# EAGLE board Autopilot_remote_sender (EAGLE 9.5.1)
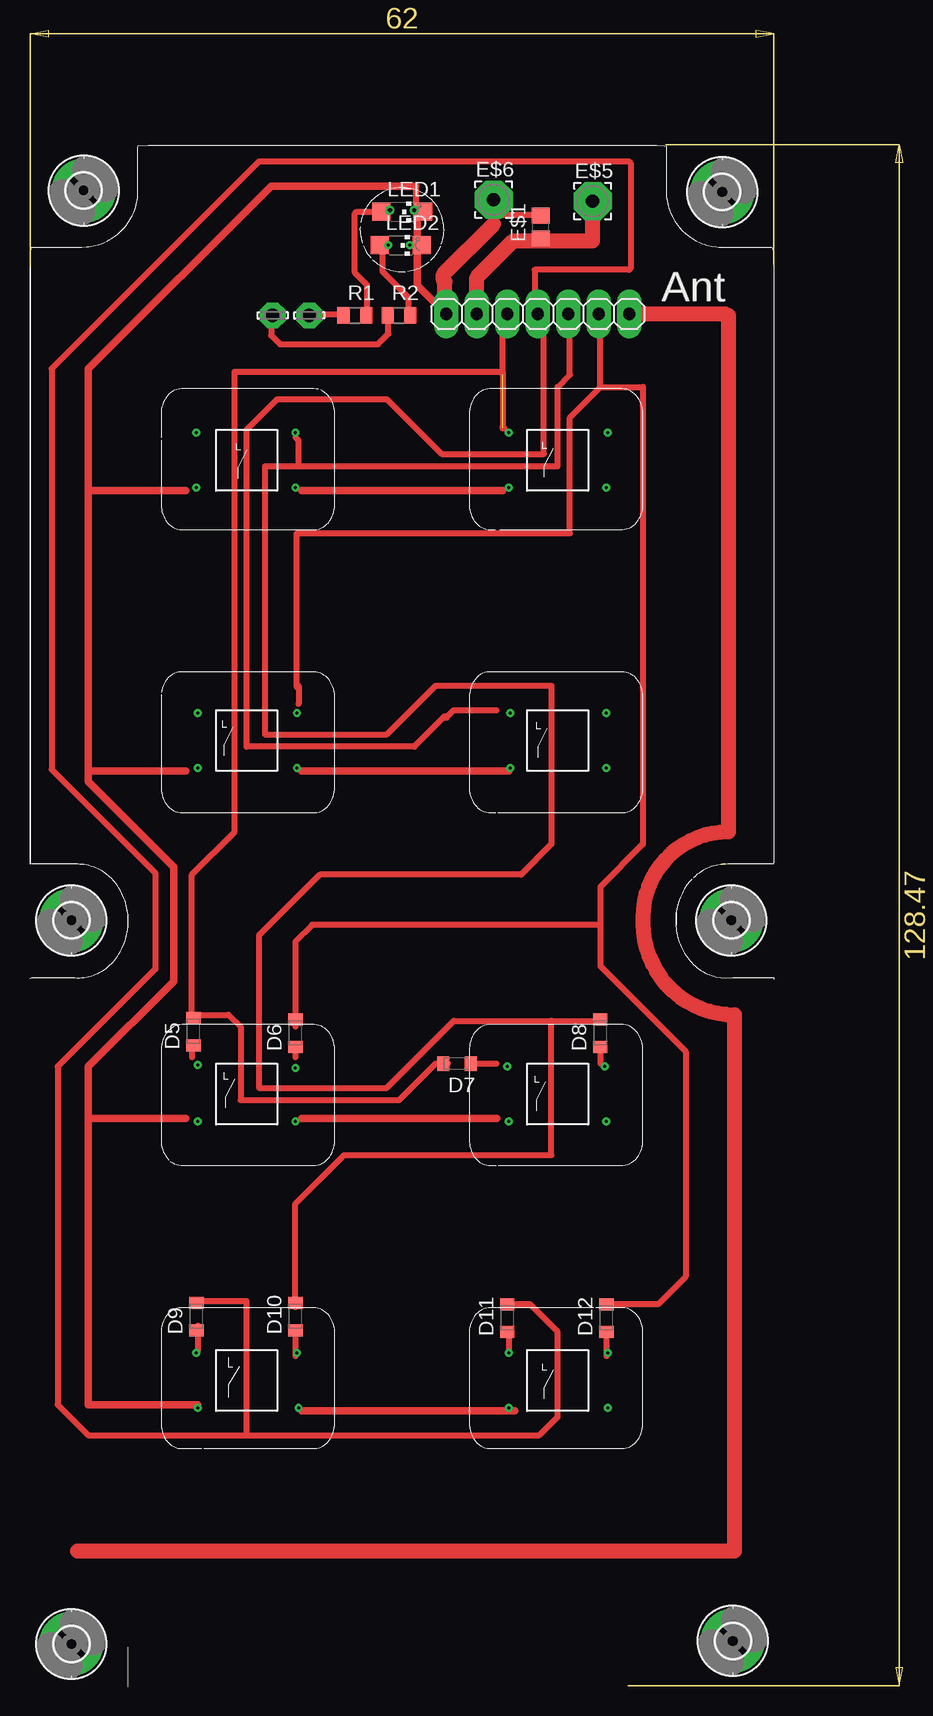
[diagram p0: board, top side]
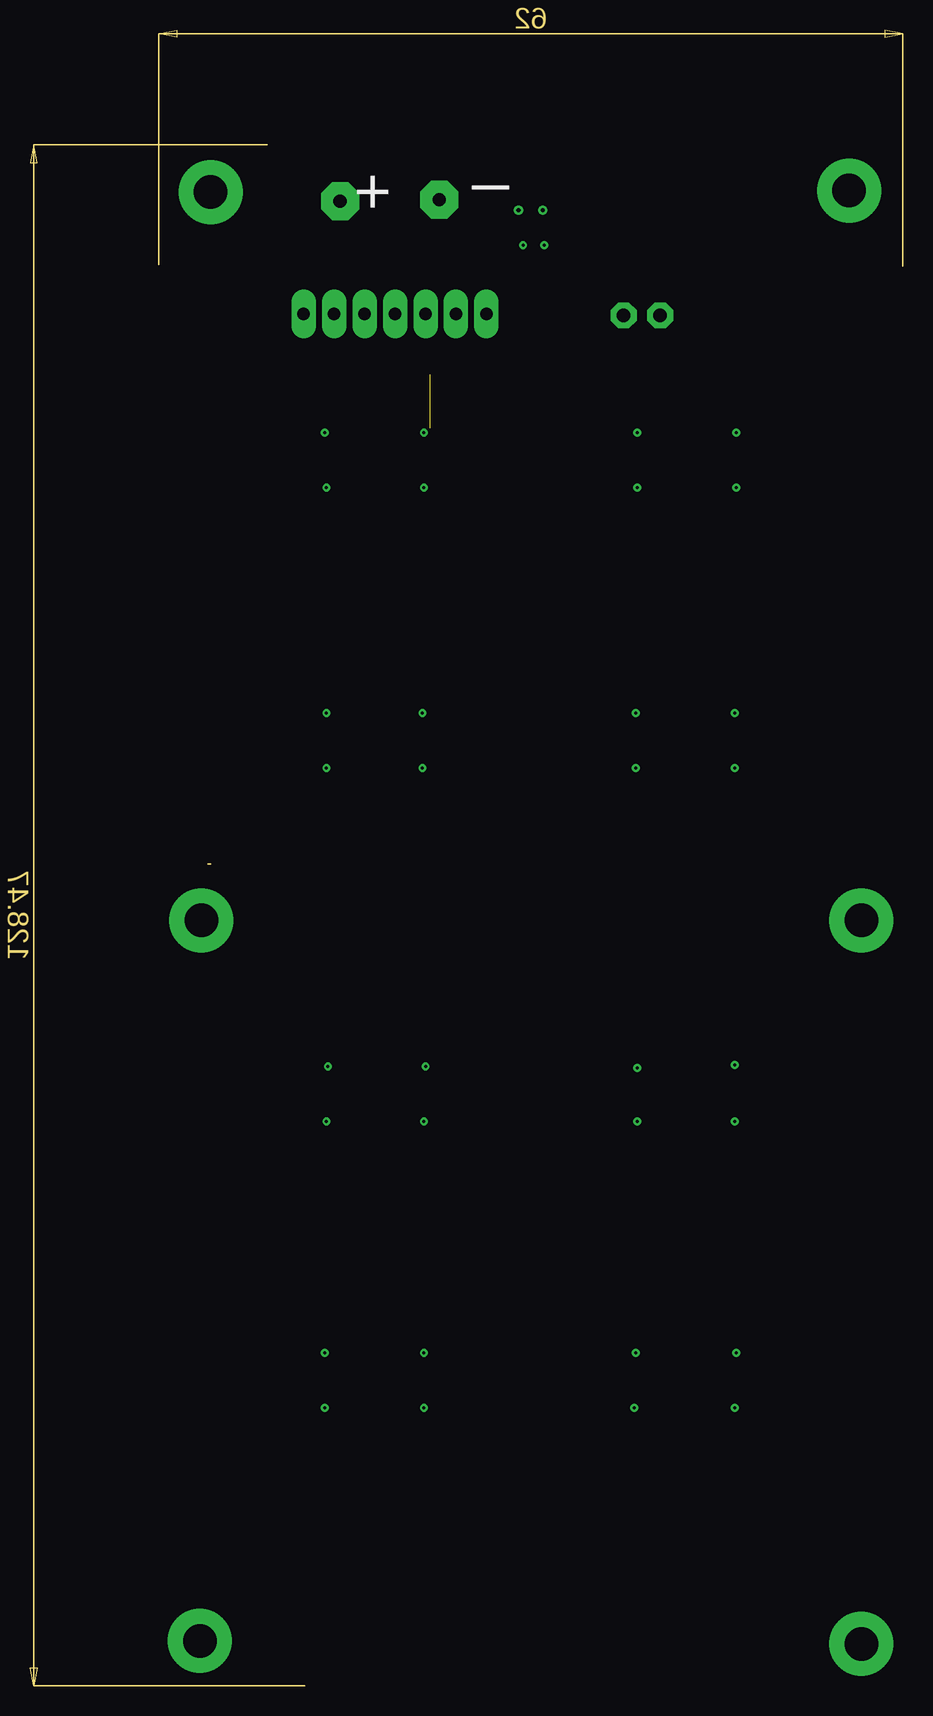
[diagram p1: board, bottom side, seen from below]

Size 0.25 x 0 mm. Coordinates in mm from the lower left corner, seen from the top.
Outline: 0.25,0 0,0
Copper layers (1*16): Top 0.035mm / dielectric 1.5mm / Bottom 0.035mm
Design rules "default *": minimum track width 20mil, minimum drill 0.6mm, track to track 15mil, track to pad 15mil, pad to pad 15mil, via to via 15mil, smd to smd 6mil, copper to edge 40mil, drill to drill 6mil, minimum pad ring 20mil, minimum via ring 8mil, stop-mask expansion 4mil, vias tented up to drill 0mil, thermal gap 10mil

## Footprints (pad centres in the part's own frame; a part is rotated, then mirrored left to right if it is on the bottom)
SOD110-W = smd 1 x 1.2: A 1.15,0; C -1.15,0
C0805 = smd 1.3 x 1.5: 1 -0.95,0; 2 0.95,0
1X07 = drill 1.016 long: 1 -7.62,0; 2 -5.08,0; 3 -2.54,0; 4 0,0; 5 2.54,0; 6 5.08,0; 7 7.62,0
LSP11 = drill 1.118 pad 2.159 octagon: MP 0,0
3,17/1,1 = drill 1.118 pad 3.175 octagon: 1 0,0
2,8-PAD = drill 2.8 pad 5.334: B2,8 0,0
CHIPLED_1206 = smd 1.5 x 1.5: A 0,-1.75; C 0,1.75
R0805 = smd 1.02 x 1.4: 1 -0.94,0; 2 0.94,0

## Placement (x,y rotation side)
D5  1N4148  [SOD110-W]  -44.07,-13.97 90 top  (outside the outline)
D6  1N4148  [SOD110-W]  -35.56,-14.1 90 top  (outside the outline)
D7  1N4148  [SOD110-W]  -22.1,-16.64 180 top  (outside the outline)
D8  1N4148  [SOD110-W]  -10.16,-14.1 90 top  (outside the outline)
D9  1N4148  [SOD110-W]  -43.81,-37.72 90 top  (outside the outline)
D10  1N4148  [SOD110-W]  -35.56,-37.72 90 top  (outside the outline)
D11  1N4148  [SOD110-W]  -17.91,-37.85 90 top  (outside the outline)
D12  1N4148  [SOD110-W]  -9.65,-37.85 90 top  (outside the outline)
E$1  [C0805]  -15.11,53.09 90 top  (outside the outline)
E$2  [1X07]  -15.37,45.85 0 top  (outside the outline)
E$4  [LSP11]  -34.42,45.72 0 top  (outside the outline)
E$5  [3,17/1,1]  -10.79,55.25 0 top  (outside the outline)
E$6  [3,17/1,1]  -19.05,55.37 0 top  (outside the outline)
E$17  [2,8-PAD]  0,56.01 0 top  (outside the outline)
E$18  [2,8-PAD]  -53.21,56.13 0 top  (outside the outline)
E$19  [LSP11]  -37.46,45.72 0 top  (outside the outline)
E$22  [2,8-PAD]  -54.23,-4.7 0 top  (outside the outline)
E$23  [2,8-PAD]  0.76,-4.7 0 top  (outside the outline)
E$24  [2,8-PAD]  0.89,-64.77 0 top  (outside the outline)
E$25  [2,8-PAD]  -54.23,-65.02 0 top  (outside the outline)
LED1  [CHIPLED_1206]  -26.67,54.36 270 top  (outside the outline)
LED2  [CHIPLED_1206]  -26.8,51.56 270 top  (outside the outline)
R1  100R  [R0805]  -30.61,45.72 0 top  (outside the outline)
R2  300R  [R0805]  -26.92,45.72 0 top  (outside the outline)

## Library data of the parts
D5-D12 = diode
E$1 = rcl
E$2 = pinhead
E$4 E$19 = solpad
E$5 E$6 = wirepad
E$17 E$18 E$22-E$25 = holes
LED1 LED2 = led
R1 R2 = smd-ipc

## Nets
S$5: E$2.5
S$8: E$2.1
S$24: E$2.3
S$25: E$2.6
S$26: E$2.4

## Tracks (layer width: path | path; a pad name or v marks a point on that pad's centre or on a via)
S$1
  Top 0.61: -44.7,31.12 -52.83,31.12 -52.83,7.75 | -52.83,7.75 -52.83,6.86 -45.72,-0.25 -45.72,-9.78 -52.83,-16.89 -52.83,-21.21 | -52.83,-21.21 -52.83,-45.08 -43.69,-45.08 | -44.7,-21.21 -52.83,-21.21 | -44.7,7.75 -52.83,7.75
S$2
  Top 0.61: -35.05,7.75 -17.78,7.75
S$3
  Top 0.61: -35.05,31.12 -18.29,31.12
S$4
  Top 0.61: -35.05,-21.21 -18.8,-21.21
S$6
  Top 0.61: -35.05,-45.59 -17.27,-45.59
S$7
  Top 1.27: 0.25,45.85 -6.98,45.85
S$8
  Top 0.61: -25.4,53.47 -25.4,48.26 E$2.1
S$9
  Top 0.508: -28.32,51.05 -28.32,49.4 -26.16,47.24 -26.16,46.23
S$10
  Top 0.508: -25.53,56.51 -25.53,53.47
  Top 0.61: -52.83,30.61 -52.83,41.28 -37.59,56.51 -25.53,56.51
S$11
  Top 1.27: 0.51,45.72 0.51,2.67 arc90 -6.6,-4.44 -6.6,-4.95 arc90 1.02,-12.57 1.02,-57.28 -53.72,-57.28
S$12
  Top 0.508: -35.31,33.27 -35.31,35.31 -35.56,35.56
S$14
  Top 0.508: -35.31,14.86 -35.31,13.33
S$15
  Top 0.508: -18.8,12.83 -22.35,12.83 -22.99,12.19 -23.11,12.19
S$16
  Top 0.508: -35.56,-15.11 -35.56,-16.13
S$17
  Top 0.508: -44.2,-15.11 -44.2,-16.13
S$18
  Top 0.508: -20.83,-16.64 -18.8,-16.64
S$19
  Top 0.508: -10.16,-15.11 -10.16,-16.64
S$20
  Top 0.508: -43.69,-38.48 -43.69,-40.51
S$21
  Top 0.508: -35.56,-38.99 -35.56,-41.02
S$22
  Top 0.508: -17.78,-38.99 -17.78,-40.51
S$23
  Top 0.508: -9.65,-38.99 -9.65,-41.02
S$27
  Top 0.508: -35.56,-36.96 -35.56,-28.32 -31.5,-24.26 -14.22,-24.26 -14.22,-13.08 | -12.7,44.45 -12.7,40.77 -13.72,39.75 -13.72,33.15 -38.1,33.15 -38.1,10.8 -27.94,10.8 -23.88,14.86 -14.22,14.86 -14.22,1.65 -16.76,-0.89 -33.53,-0.89 -38.61,-5.97 -38.61,-18.67 -27.94,-18.67 -22.35,-13.08 -14.22,-13.08 | -14.22,-13.08 -10.16,-13.08
S$28
  Top 0.508: -39.62,-47.62 -52.83,-47.62 -55.37,-45.08 -55.37,-16.89 -47.24,-8.76 -47.24,-0.76 -55.88,7.87 -55.88,41.28 -38.61,58.55 -7.75,58.55 -7.62,58.42 -7.62,49.66 -7.75,49.53 -15.62,49.53 -15.62,46.48 -15.49,46.35 | -39.62,-47.62 -39.62,-36.45 -43.69,-36.45 | -39.62,-47.62 -15.24,-47.62 -13.72,-46.1 -13.72,-38.99 -16,-36.7 -17.15,-36.7
S$29
  Top 0.508: -35.43,14.73 -35.43,27.56 -12.7,27.56 -12.7,37.21 -10.16,39.75 | -10.16,39.75 -10.16,43.94 | -10.16,39.75 -6.6,39.75 -6.6,1.65 -10.16,-1.91 -10.16,-5.08 | -10.16,-5.08 -34.16,-5.08 -35.56,-6.48 -35.56,-13.59 | -10.16,-5.08 -10.16,-8.51 -3.05,-15.62 -3.05,-34.42 -5.33,-36.7 -9.14,-36.7
S$30
  Top 0.508: -23.11,12.32 -25.65,9.78 -39.62,9.78 -39.62,36.19 -37.08,38.74 -27.94,38.74 -23.37,34.16 -14.86,34.16 -14.86,44.7
S$31  (1 unrouted)
  Top 0.508: -44.2,-13.08 -44.2,-12.57 | -44.2,-12.57 -44.2,-0.89 -40.64,2.67 -40.64,41.02 -18.29,41.02 -18.29,36.45 -18.16,36.32 -18.29,36.32 | -18.29,40.77 -18.29,44.2 -17.4,45.09 | -44.2,-12.57 -41.15,-12.57 -40.13,-13.59 -40.13,-19.69 -26.92,-19.69 -23.88,-16.64 -22.86,-16.64
S$32
  Top 0.508: -29.59,46.23 -29.59,48.26 -30.61,49.28 -30.61,54.23 -30.48,54.36 -28.83,54.36 -28.7,54.23
S$33
  Top 0.508: -34.42,45.85 -31.75,45.85
S$34
  Top 0.508: -37.59,45.72 -37.59,44.07 -36.83,43.31 -28.7,43.31 -27.81,44.2 -27.81,45.34
S$35  (via drill 0.35 pad 0.55)
  other vias: -27.69,54.48
S$36  (via drill 0.35 pad 0.55)
  other vias: -25.65,54.48
S$37  (via drill 0.25 pad 0.55)
  other vias: -27.81,51.56
S$38  (via drill 0.25 pad 0.55)
  other vias: -26.04,51.56
S$39  (via drill 0.25 pad 0.55)
  other vias: -43.81,35.94
S$40  (via drill 0.25 pad 0.55)
  other vias: -35.56,35.94
S$41  (via drill 0.25 pad 0.55)
  other vias: -43.81,31.37
S$42  (via drill 0.25 pad 0.55)
  other vias: -35.56,31.37
S$43  (via drill 0.25 pad 0.55)
  other vias: -17.78,35.94
S$44  (via drill 0.25 pad 0.55)
  other vias: -9.52,35.94
S$45  (via drill 0.25 pad 0.55)
  other vias: -9.65,31.37
S$46  (via drill 0.25 pad 0.55)
  other vias: -17.78,31.37
S$47  (via drill 0.25 pad 0.55)
  other vias: -43.69,12.57
S$48  (via drill 0.25 pad 0.55)
  other vias: -35.43,12.57
S$49  (via drill 0.25 pad 0.55)
  other vias: -43.69,8
S$50  (via drill 0.25 pad 0.55)
  other vias: -35.43,8
S$51  (via drill 0.25 pad 0.55)
  other vias: -17.65,8
S$52  (via drill 0.25 pad 0.55)
  other vias: -17.65,12.57
S$53  (via drill 0.25 pad 0.55)
  other vias: -9.65,12.57
S$54  (via drill 0.25 pad 0.55)
  other vias: -9.65,8
S$55  (via drill 0.25 pad 0.55)
  other vias: -43.69,-16.76
S$56  (via drill 0.25 pad 0.55)
  other vias: -35.56,-17.02
S$57  (via drill 0.25 pad 0.55)
  other vias: -35.56,-21.46
S$58  (via drill 0.25 pad 0.55)
  other vias: -43.69,-21.46
S$59  (via drill 0.25 pad 0.55)
  other vias: -17.78,-21.46
S$60  (via drill 0.25 pad 0.55)
  other vias: -17.91,-16.89
S$61  (via drill 0.25 pad 0.55)
  other vias: -9.78,-16.89
S$62  (via drill 0.25 pad 0.55)
  other vias: -9.65,-21.46
S$63  (via drill 0.25 pad 0.55)
  other vias: -43.81,-40.77
S$64  (via drill 0.25 pad 0.55)
  other vias: -35.43,-40.77
S$65  (via drill 0.25 pad 0.55)
  other vias: -35.31,-45.34
S$66  (via drill 0.25 pad 0.55)
  other vias: -43.69,-45.34
S$67  (via drill 0.25 pad 0.55)
  other vias: -17.78,-40.77
S$68  (via drill 0.25 pad 0.55)
  other vias: -9.52,-40.77
S$69  (via drill 0.25 pad 0.55)
  other vias: -9.52,-45.34
S$70  (via drill 0.25 pad 0.55)
  other vias: -17.78,-45.34
S$71
  Top 1.27: -23.11,47.62 -23.11,48.51 -23.24,48.64 -23.24,49.15 -19.05,53.34
S$72
  Top 1.27: -20.45,47.37 -20.45,48.9 -17.4,51.94 -10.79,51.94 -10.79,54.48
S$73
  Top 0.508: -18.67,54.1 -15.49,54.1 -15.37,54.23

## Text on the board
bPlace: _ | +
tNames: Ant
tText: send | chrg | -1 | +1 | -10 | +10 | STBY | AUTO | WIND | TRCK